# EAGLE board CAN Mirror (EAGLE 6.4)
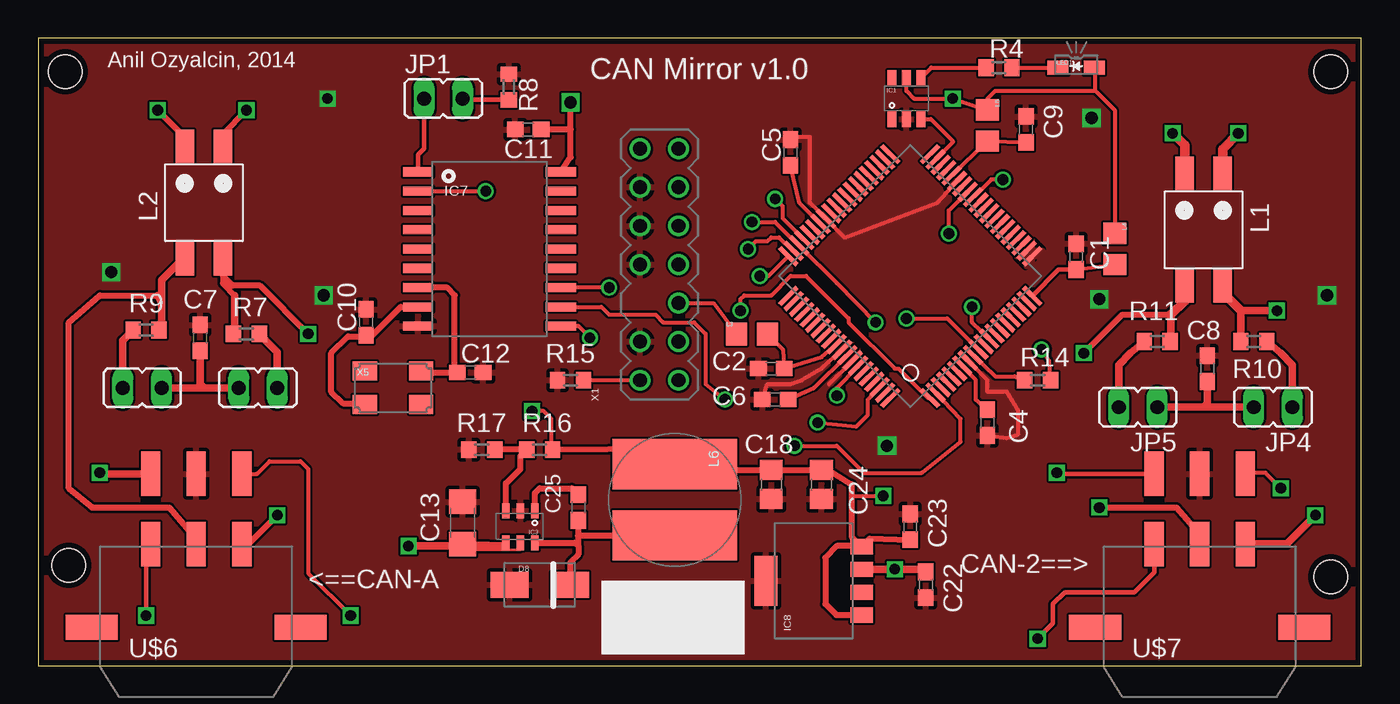
[diagram p0: board, top side]
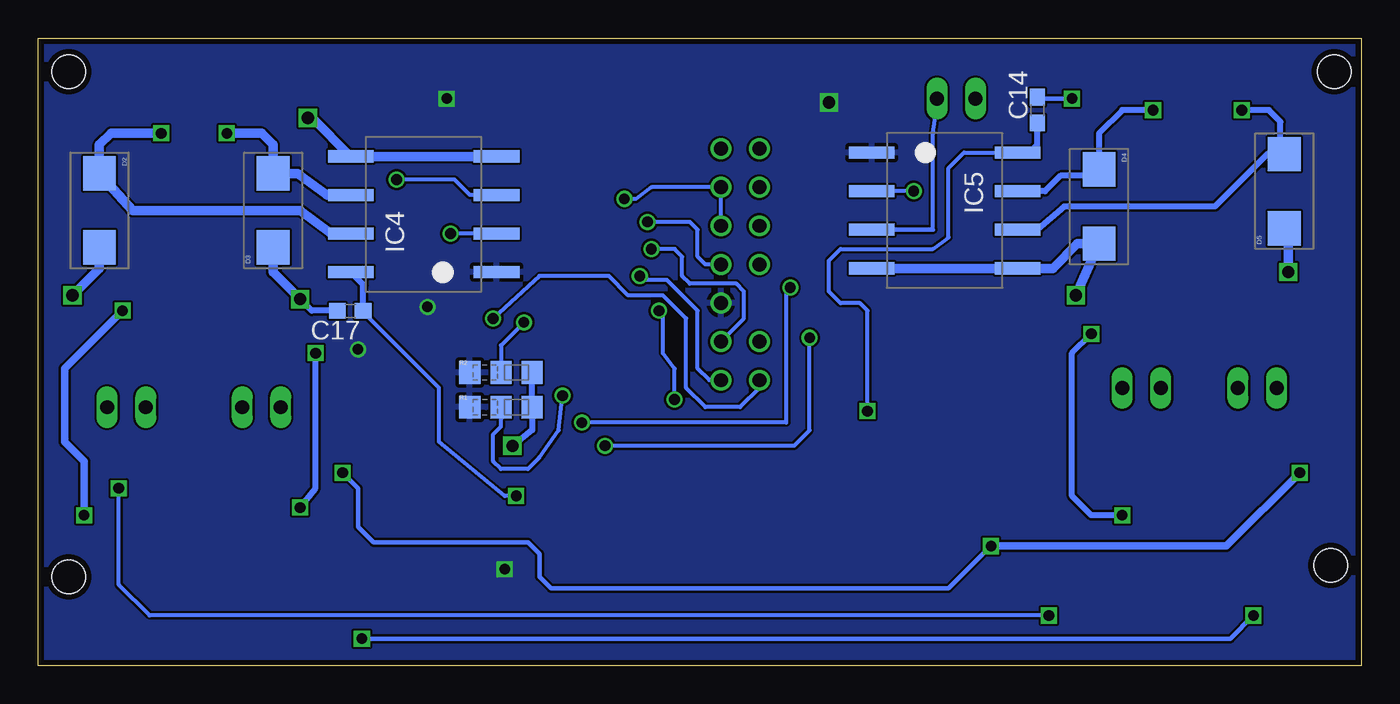
[diagram p1: board, bottom side, seen from below]

Size 87.1 x 41.33 mm. Coordinates in mm from the lower left corner, seen from the top.
Outline: 0,0 87.1,0 87.1,41.33 0,41.33 0,0
Copper layers (1*16): Top 0.0356mm / dielectric 1.5011mm / Bottom 0.0356mm
Design rules "OSH Park 2-layer": minimum track width 6mil, minimum drill 13mil, track to track 6mil, track to pad 6mil, pad to pad 6mil, via to via 6mil, smd to smd 6mil, copper to edge 15mil, drill to drill 6mil, minimum pad ring 7mil, minimum via ring 7mil, stop-mask expansion 4mil, vias tented up to drill 0mil, thermal gap 10mil
Holes 2.2 mm at 1.78,39.12 85.09,39.12 85.09,5.84 2.03,6.6

## Footprints (pad centres in the part's own frame; a part is rotated, then mirrored left to right if it is on the bottom)
C0603 = smd 1.1 x 1: 1 -0.85,0; 2 0.85,0
C1206 = smd 1.6 x 1.8: 1 -1.4,0; 2 1.4,0
C0805 = smd 1.3 x 1.5: 1 -0.95,0; 2 0.95,0
DO-214AA = smd 2.261 x 2.159: 1 -2.438,0; 2 2.438,0
SMA = smd 2.5 x 1.7: ANODE -2,0; CATHODE 2,0
DBV_(R-PDSO-G6) = smd 0.6 x 1.05: 1 -0.95,-1.35; 2 0,-1.35; 3 0.95,-1.35; 4 0.95,1.35; 5 0,1.35; 6 -0.95,1.35
SOT-6_DDC = smd 0.5 x 1: 1 -0.95,-1.05; 2 0,-1.05; 3 0.95,-1.05; 4 0.95,1.05; 5 0,1.05; 6 -0.95,1.05
DUB_(R-PDSO-G8) = smd 0.8 x 3: 1 -3.81,-4.8; 2 -1.27,-4.8; 3 1.27,-4.8; 4 3.81,-4.8; 5 3.81,4.8; 6 1.27,4.8; 7 -1.27,4.8; 8 -3.81,4.8
SOIC18 = smd 0.6 x 2: 1 -5.08,-4.7; 2 -3.81,-4.7; 3 -2.54,-4.7; 4 -1.27,-4.7; 5 0,-4.7; 6 1.27,-4.7; 7 2.54,-4.7; 8 3.81,-4.7; 9 5.08,-4.7; 10 5.08,4.7; 11 3.81,4.7; 12 2.54,4.7; 13 1.27,4.7; 14 0,4.7; 15 -1.27,4.7; 16 -2.54,4.7; 17 -3.81,4.7; 18 -5.08,4.7
SOT-223-5 = smd 1 x 1.5: 1 -2.25,-3.15; 2 -0.75,-3.15; 3 0.75,-3.15; 4 2.25,-3.15 | smd 3.3 x 1.5: 5 0,3.15
JP1 = drill 0.914 long: 1 0,-1.27; 2 0,1.27
SMD = smd 2.21 x 1.2: 1 -3.7,1.25; 2 -3.7,-1.25; 3 3.7,-1.25; 4 3.7,1.25
0603 = smd 1.4 x 1.5: A 1.025,0; B -1.025,0
VLP8040 = smd 3.3 x 8.2: 1 2.35,0; 2 -2.35,0
SMS1105 = smd 1.4 x 0.9: ANODE 1.2,0; CATHODE -1.2,0
0603-JUMPER-3WAY = smd 1.4 x 1.5: A 1.025,0; B -1.025,0; C 3.075,0
R0603 = smd 1 x 1.1: 1 -0.85,0; 2 0.85,0
PQFP-80_(S-PQFP-G80) = smd 0.3 x 1.6: 1 -4.75,-6.6; 2 -4.25,-6.6; 3 -3.75,-6.6; 4 -3.25,-6.6; 5 -2.75,-6.6; 6 -2.25,-6.6; 7 -1.75,-6.6; 8 -1.25,-6.6; 9 -0.75,-6.6; 10 -0.25,-6.6; 11 0.25,-6.6; 12 0.75,-6.6; 13 1.25,-6.6; 14 1.75,-6.6; 15 2.25,-6.6; 16 2.75,-6.6; 17 3.25,-6.6; 18 3.75,-6.6; 19 4.25,-6.6; 20 4.75,-6.6; 41 4.75,6.6; 42 4.25,6.6; 43 3.75,6.6; 44 3.25,6.6; 45 2.75,6.6; 46 2.25,6.6; 47 1.75,6.6; 48 1.25,6.6; 49 0.75,6.6; 50 0.25,6.6; 51 -0.25,6.6; 52 -0.75,6.6; 53 -1.25,6.6; 54 -1.75,6.6; 55 -2.25,6.6; 56 -2.75,6.6; 57 -3.25,6.6; 58 -3.75,6.6; 59 -4.25,6.6; 60 -4.75,6.6 | smd 1.6 x 0.3: 21 6.6,-4.75; 22 6.6,-4.25; 23 6.6,-3.75; 24 6.6,-3.25; 25 6.6,-2.75; 26 6.6,-2.25; 27 6.6,-1.75; 28 6.6,-1.25; 29 6.6,-0.75; 30 6.6,-0.25; 31 6.6,0.25; 32 6.6,0.75; 33 6.6,1.25; 34 6.6,1.75; 35 6.6,2.25; 36 6.6,2.75; 37 6.6,3.25; 38 6.6,3.75; 39 6.6,4.25; 40 6.6,4.75; 61 -6.6,4.75; 62 -6.6,4.25; 63 -6.6,3.75; 64 -6.6,3.25; 65 -6.6,2.75; 66 -6.6,2.25; 67 -6.6,1.75; 68 -6.6,1.25; 69 -6.6,0.75; 70 -6.6,0.25; 71 -6.6,-0.25; 72 -6.6,-0.75; 73 -6.6,-1.25; 74 -6.6,-1.75; 75 -6.6,-2.25; 76 -6.6,-2.75; 77 -6.6,-3.25; 78 -6.6,-3.75; 79 -6.6,-4.25; 80 -6.6,-4.75
MICROFIT-6-DUAL-RA-SMD = smd 1.27 x 2.921: 1 3,5.47; 2 0,5.47; 3 -3,5.47; 4 3,10.1; 5 0,10.1; 6 -3,10.1 | smd 3.429 x 1.651: P$9 6.883,0; P$10 -6.883,0
TI_JTAG_HEADER = drill 0.914: 1 -7.62,-1.27; 2 -7.62,1.27; 3 -5.08,-1.27; 4 -5.08,1.27; 5 -2.54,-1.27; 7 0,-1.27; 8 0,1.27; 9 2.54,-1.27; 10 2.54,1.27; 11 5.08,-1.27; 12 5.08,1.27; 13 7.62,-1.27; 14 7.62,1.27
ECX-53B = smd 1.6 x 1.25: 1 -1.85,-1.1; 2 1.85,-1.1; 3 1.85,1.1; 4 -1.85,1.1

## Placement (x,y rotation side)
C1  2.2uF  [C0603]  68.33,26.92 90 top
C2  2.2uF  [C0603]  48.26,19.56 180 top
C4  2.2uF  [C0603]  62.48,16 270 top
C5  2.2uF  [C0603]  49.53,33.78 90 top
C6  2.2uF  [C0603]  48.51,17.53 180 top
C7  4.7 nF  [C0603]  10.67,21.59 90 top
C8  4.7 nF  [C0603]  76.96,19.56 90 top
C9  2.2uF  [C0603]  65.02,35.31 90 top
C10  8pF  [C0603]  21.59,22.61 90 top
C11  0.1uF  [C0603]  32.26,35.31 180 top
C12  8pF  [C0603]  28.45,19.3 0 top
C13  1 uF  [C1206]  27.94,9.4 90 top
C14  2.2 uF  [C0603]  21.34,36.58 90 bottom
C17  2.2 uF  [C0603]  66.55,23.37 180 bottom
C18  22 uF  [C0805]  48.26,11.94 270 top
C22  10 uF  [C0603]  58.42,5.33 270 top
C23  4.7 uF  [C0603]  57.4,9.14 90 top
C24  22 uF  [C0805]  51.56,11.94 270 top
C25  0.1 uF  [C0603]  35.56,10.41 270 top
D2  [DO-214AA]  83.06,29.97 270 bottom
D3  [DO-214AA]  71.63,29.97 90 bottom
D4  [DO-214AA]  17.27,30.23 270 bottom
D5  [DO-214AA]  5.08,31.24 90 bottom
D8  [SMA]  33.02,5.33 0 top
IC1  SN74LVCG207DBV  [DBV_(R-PDSO-G6)]  57.15,37.34 0 top
IC3  LMR14206  [SOT-6_DDC]  31.75,9.14 180 top
IC4  ISO1050  [DUB_(R-PDSO-G8)]  61.72,29.72 90 bottom
IC5  ISO1050  [DUB_(R-PDSO-G8)]  27.43,29.97 270 bottom
IC7  MCP2515-I/SO  [SOIC18]  29.72,27.43 270 top
IC8  LP38693-3.3/NOPBMP  [SOT-223-5]  51.05,5.59 90 top
JP1  [JP1]  26.67,37.34 270 top
JP2  [JP1]  14.48,18.29 90 top
JP3  [JP1]  6.86,18.29 90 top
JP4  [JP1]  81.28,17.02 90 top
JP5  [JP1]  72.39,17.02 90 top
L1  DR331-513AE  [SMD]  76.71,28.7 270 top
L2  DR331-513AE  [SMD]  10.92,30.48 270 top
L3  [0603]  46.99,21.84 0 top
L4  [0603]  70.87,27.43 270 top
L5  [0603]  62.48,35.56 270 top
L6  18 uH  [VLP8040]  41.91,10.92 270 top
LED1  [SMS1105]  68.33,39.37 0 top
R1  [0603-JUMPER-3WAY]  57.66,17.02 0 bottom
R2  [0603-JUMPER-3WAY]  57.66,19.3 0 bottom
R4  300  [R0603]  63.25,39.37 0 top
R7  60  [R0603]  13.72,21.84 0 top
R8  4.7k  [R0603]  30.99,38.1 270 top
R9  60  [R0603]  7.11,22.1 180 top
R10  60  [R0603]  80.01,21.34 0 top
R11  60  [R0603]  73.66,21.34 180 top
R14  2k2  [R0603]  65.79,18.8 0 top
R15  2k2  [R0603]  35.05,18.8 0 top
R16  5.6k 1%  [R0603]  33.02,14.22 0 top
R17  1k 1%  [R0603]  29.21,14.22 0 top
U$1  TMS320F28034PNT  [PQFP-80_(S-PQFP-G80)]  57.4,25.65 45 top
U$2  CURRENT-C-LETTER-LANDSCAPE  [BLANK]  -38.1,67.31 0 top  (outside the outline)
U$3  CURRENT-C-LETTER-LANDSCAPE  [BLANK]  -66.04,-2.54 0 top  (outside the outline)
U$5  CURRENT-C-LETTER-LANDSCAPE  [BLANK]  -40.64,67.31 0 top  (outside the outline)
U$6  MICROFIT-06-DUAL-RA-SMD  [MICROFIT-6-DUAL-RA-SMD]  10.41,2.54 0 top
U$7  MICROFIT-06-DUAL-RA-SMD  [MICROFIT-6-DUAL-RA-SMD]  76.45,2.54 0 top
X1  [TI_JTAG_HEADER]  40.89,26.42 90 top
X5  20 MHz  [ECX-53B]  23.37,18.29 0 top

## Library data of the parts
C1 C2 C4-C12 C14 C17 C22 C23 C25 R4 R7-R11 R14 R15 = rcl
C13 = rcl; PARTNO: GRM32RR71H105KA01L
C18 C24 = rcl; PARTNO: GRM21BR60J226ME39L
D2-D5 = Littelfuse; PARTNO: SMBJ30CALFCT-ND
D8 = Diodes; PARTNO: B130-13-F
IC1 IC3 X1 = TI
IC4 IC5 = TI; PARTNO: ISO1050DUBR
IC7 = Microchip; PARTNO: MCP2515-I/SO
IC8 = TI; PARTNO: LP38693MP-3.3/NOPB
JP1-JP5 = jumper
L1 L2 = Bourns; PARTNO: DR331-513AECT-ND
L3-L5 R1 R2 = Passives
L6 = TDK; PARTNO: SDR0604-180YL
LED1 = Bivar
R16 = rcl; PARTNO: RR0510P-3321-D
R17 = rcl; PARTNO: CRCW04021K00JNTD
U$1 = TI; PARTNO: TMS320F28035PNT
U$2 U$3 U$5 = Frames; BOM: EXCLUDE
U$6 U$7 = Molex
X5 = Crystals

## Nets
!INT: IC7.12 U$1.78
!RX0BF: IC7.11 U$1.1
!RX1BF: IC7.10 U$1.2
+3V3: C11.1 C22.1 IC1.5 IC4.1 IC5.1 IC7.18 IC8.3 L3.B L4.B L5.B LED1.ANODE R1.B R2.B R14.2 U$1.12 X1.5
+5V: C14.1 C17.1 C18.1 C23.1 C24.1 IC4.8 IC5.8 IC8.1 IC8.4 L6.2 R16.2
+12V: C13.1 IC3.4 IC3.5 U$6.6 U$7.6
BTN: U$1.3
CAM_!CS: IC7.16
CAM_!RST: IC7.17
CAM_SCK: IC7.13
CAM_SI: IC7.14
CAM_SO: IC7.15
CAN_!CS: U$1.75
CAN_!RST: U$1.61
CAN_SCK: U$1.77
CAN_SI: U$1.80
CAN_SO: U$1.76
CANH_2: L1.4 R10.1 U$7.1
CANH_2_NF: D2.1 IC4.7 L1.1
CANH_A: L2.4 R7.1 U$6.1
CANH_A_NF: D4.1 IC5.7 L2.1
CANL_2: L1.3 R11.1 U$7.2
CANL_2_NF: D3.2 IC4.6 L1.2
CANL_A: L2.3 R9.1 U$6.2
CANL_A_NF: D5.2 IC5.6 L2.2
EMU0: X1.13
EMU1: X1.14
GND: C1.2 C2.2 C4.2 C5.2 C6.2 C7.2 C8.2 C9.2 C10.2 C11.2 C12.2 C13.2 C14.2 C17.2 C18.2 C22.2 C23.2 C24.2 D2.2 D3.1 D4.2 D5.1 D8.ANODE IC1.2 IC3.2 IC4.4 IC4.5 IC5.4 IC5.5 IC7.9 IC8.5 R1.C R2.C R8.1 R15.1 R17.1 U$1.8 U$1.21 U$1.22 U$1.35 U$1.53 U$1.71 U$1.73 U$6.5 U$7.5 X1.4 X1.8 X1.10 X1.12
GPIO34: R1.A U$1.74
JTAG_!TRST: R15.2 U$1.10 X1.2
JTAG_TCK: U$1.57 X1.9 X1.11
JTAG_TDI: U$1.59 X1.3
JTAG_TDO: R2.A U$1.58 X1.7
JTAG_TMS: U$1.60 X1.1
LED0: U$1.34
LED1: IC1.3 U$1.39
N$1: R14.1 U$1.9
N$2: C1.1 L4.A U$1.20
N$3: C2.1 L3.A U$1.70
N$4: IC1.4 R4.1
N$5: C6.1 U$1.72
N$6: C5.1 U$1.54
N$7: C4.1 U$1.7
N$9: LED1.CATHODE R4.2
N$10: C9.1 L5.A U$1.36
N$12: JP2.1 R7.2
N$13: JP3.2 R9.2
N$14: C7.1 JP2.2 JP3.1
N$15: JP4.1 R10.2
N$16: JP5.2 R11.2
N$17: C8.1 JP4.2 JP5.1
N$21: C25.2 D8.CATHODE IC3.6 L6.1
N$22: C25.1 IC3.1
N$24: C10.1 IC7.8 X5.1
N$25: C12.1 IC7.7 X5.3
RXCAN0: IC4.2 U$1.33
RXCAN1: IC5.2 IC7.2
SHIELD: U$6.4 U$7.4
SHIELD_GND: U$6.3 U$7.3
TXCAN0: IC4.3 U$1.32
TXCAN1: IC7.1 JP1.1
TXCAN_NJ: IC5.3 JP1.2 R8.2
VSENSE1: IC3.3 R16.1 R17.2

## Tracks (layer width: path | path; a pad name or v marks a point on that pad's centre or on a via)
!INT  (via drill 0.7)
  Top 0.254: U$1.78 54.61,17.53 54.61,16.51 53.85,15.75 v51.31,16 | v37.59,24.89 IC7.12
  Bottom 0.254: v51.31,16 37.85,16 37.85,24.64 v37.59,24.89
!RX0BF  (via drill 0.7)
  Top 0.254: IC7.11 37.08,23.62 37.59,23.11 40.64,23.11 41.15,22.61 43.18,22.61 43.94,21.84 43.94,18.54 v45.21,17.53 | U$1.1 58.57,17.63 56.64,19.56 56.39,19.56 53.34,22.61 53.34,22.86 50.55,25.65 49.53,25.65 48.26,24.38 46.48,24.38 46.23,24.13 v46.23,23.37
  Bottom 0.254: v45.21,17.53 45.21,19.56 45.97,20.57 45.97,23.11 v46.23,23.37
!RX1BF  (via drill 0.7)
  Top 0.254: U$1.2 60.71,16.26 60.71,14.73 58.2,12.72 | 58.2,12.72 58.17,12.7 | IC7.10 35.56,22.35 v36.32,21.59 | v49.78,14.48 52.58,14.48 54.36,12.7 58.17,12.7 58.2,12.72
  Bottom 0.254: v36.32,21.59 36.32,15.49 37.34,14.48 v49.78,14.48
+3V3  (via drill 0.7, 0.8)
  Top 0.254: v61.47,23.62 61.47,22.61 U$1.12 | X1.5 44.45,23.88 L3.B | L4.B 70.87,36.58 69.6,37.85 | 69.6,37.85 62.99,37.85 62.48,37.34 L5.B v60.2,37.34 57.66,37.34 57.15,37.85 IC1.5 | 69.6,37.85 69.6,39.3 LED1.ANODE | v66.04,20.83 66.55,20.07 R14.2
  Top 0.406: IC8.3 54.45,6.1 | 57.82,6.35 C22.1 | 35.05,35.31 35.05,33.48 IC7.18 | 35.05,35.31 v35.05,37.08 | 35.05,35.31 C11.1
  Top 0.508: 57.82,6.35 v56.39,6.35 54.22,6.35 IC8.3
  pour Bottom: -2.79,-3.56 88.65,-3.56 88.39,43.69 -3.05,43.69
+5V  (via drill 0.7)
  Top 0.254: 53.54,11.18 v55.63,11.18 | v32.51,16.76 33.27,16.76 33.78,16.26 33.78,14.31 R16.2
  Top 0.406: R16.2 41.17,14.29 L6.2 42.04,12.89 C18.1 C24.1 52.02,12.89 53.54,11.94 53.54,11.18 53.54,8.5 IC8.4 | C23.1 54.75,8.38 IC8.4 | IC8.1 52.54,3.34 51.82,4.06 51.82,7.11 52.58,7.87 54.17,7.87 IC8.4
  Bottom 0.254: C17.1 65.7,23.28 60.71,18.29 60.71,14.73 56.39,11.18 v55.63,11.18 | IC5.8 26.16,33.78 27.18,32.77 27.18,28.19 28.19,27.43 34.29,27.43 35.05,26.67 35.05,24.64 34.29,23.88 33.02,23.88 32.51,23.37 v32.51,16.76
  Bottom 0.406: C17.1 65.7,25.08 IC4.8 | C14.1 21.34,34.29 21.84,33.78 IC5.8
+12V  (via drill 0.7)
  Top 0.152: IC3.5 31.75,7.62 27.94,7.62 C13.1
  Top 0.305: U$7.6 67.12,12.64 v67.06,12.7
  Top 0.406: 30.61,7.9 IC3.4
  Top 0.508: 30.61,7.9 C13.1 27.82,7.87 v24.38,7.87 | U$6.6 4.06,12.64 v4.06,12.7
  Bottom 0.305: v67.06,12.7 66.04,11.68 66.04,9.14 65.02,8.13 54.86,8.13 54.1,7.37 54.1,5.84 53.34,5.08 27.18,5.08 v24.38,7.87
  Bottom 0.508: v4.06,12.7 8.89,7.87 v24.38,7.87
CANH_2  (via drill 0.7)
  Top 0.508: R10.1 79.16,23.37 v81.53,23.37 | U$7.1 82.18,8.01 v84.07,9.91
  Top 0.61: L1.4 77.96,24.57 79.16,23.37
  Bottom 0.508: v84.07,9.91 84.07,13.46 85.34,14.73 85.34,19.56 v81.53,23.37
CANH_2_NF  (via drill 0.7)
  Top 0.61: L1.1 77.96,34.02 v78.99,35.05
  Bottom 0.61: IC4.7 67.82,28.45 69.85,29.97 80.87,29.97 D2.1 83.06,34.29 82.3,35.05 v78.99,35.05
CANH_A  (via drill 0.7)
  Top 0.406: U$6.1 13.85,8.01 v15.75,9.91 | v17.78,21.84 14.61,25.02 12.81,25.02 12.17,25.65 | 12.17,25.65 12.17,25.17 12.95,24.38 | 12.17,25.65 L2.4
  Top 0.508: 12.95,24.38 12.95,21.93 R7.1
  Bottom 0.406: v15.75,9.91 17.78,9.91 19.05,11.18 19.05,20.57 v17.78,21.84
CANH_A_NF  (via drill 0.7)
  Top 0.406: L2.1 12.17,35.03 v13.72,36.58
  Bottom 0.406: IC5.7 20.83,31.24 19.81,32.26 17.68,32.26 D4.1 | v13.72,36.58 15.75,36.58 17.27,35.05 D4.1 | D4.1 17.27,32
CANL_2  (via drill 0.7)
  Top 0.406: U$7.2 76.45,8.64 74.93,10.41 v69.85,10.41 | v68.83,20.57 71.37,23.11 74.57,23.11
  Top 0.508: 74.57,23.11 74.57,21.39 R11.1
  Top 0.61: L1.3 75.46,24.01 74.57,23.11
  Bottom 0.406: v69.85,10.41 68.83,11.68 v68.83,20.57
CANL_2_NF  (via drill 0.7)
  Top 0.61: L1.2 75.46,34.27 v74.68,35.05
  Bottom 0.61: v74.68,35.05 72.39,35.05 71.63,34.29 D3.2 70,32.41 68.07,30.99 IC4.6
CANL_A
  Top 0.406: 10.16,8.64 8.64,10.41 3.56,10.41 2.03,11.68 2.03,22.61 4.06,24.38 7.87,24.38 | 9.51,26.78 L2.3
  Top 0.508: 8.13,23.88 8.13,22.19 R9.1 | 8.13,23.88 8.13,25.4 9.51,26.78 | 10.16,8.64 U$6.2 | 7.87,24.38 8.13,23.88
CANL_A_NF  (via drill 0.7)
  Top 0.406: L2.2 9.67,34.78 v7.87,36.58
  Bottom 0.406: IC5.6 21.34,28.7 19.56,30.23 9.65,30.23 6.2,33.68 D5.2 5.33,33.93 5.33,35.81 6.1,36.58 v7.87,36.58
GND  (via drill 0.7, 0.8)
  Top 0.254: C5.2 49.95,34.8 50.8,34.8 50.8,30.48 U$1.53 53.09,28.19 59.18,30.48 U$1.35 | U$1.8 62.48,18.8 62.48,18.03 63.75,18.03 64.52,16.76 64.52,15.24 63.75,14.99 C4.2 | U$1.71 51.56,19.56 50.29,18.8 49.53,18.54 48.01,18.54 C6.2 | U$1.73 52.58,19.05 52.07,18.54
  Bottom 0.305: v19.05,37.34 21.25,37.34 C14.2
  Bottom 0.406: 4.83,28.55 D5.1 | R2.C R1.C 54.58,15.52 v55.88,14.48 | C17.2 69.09,23.37 v69.85,24.13
  Bottom 0.61: v4.83,25.91 4.83,28.55 | v18.8,24.38 D4.2 18.69,27.79 20.32,26.16 IC5.5 IC5.4 | D3.1 71.63,25.91 v69.85,24.13 | D2.2 83.06,26.16 v84.84,24.38 | IC4.4 IC4.5 69.06,36.07 v69.34,36.07
  pour Top: -2.29,-3.05 90.17,-2.79 90.17,42.67 -2.54,42.93
GPIO34  (via drill 0.7)
  Top 0.254: v52.58,17.78 52.58,18.29 53.97,19.68 U$1.74
  Bottom 0.254: 56.64,17.01 56.64,15.75 57.15,15.24 57.15,13.46 56.64,12.95 54.86,12.95 54.1,13.72 52.83,15.49 v52.58,17.78
  Bottom 0.305: 56.64,16.26 56.64,17.01 R1.A
JTAG_!TRST  (via drill 0.7)
  Top 0.254: R15.2 X1.2 | v57.15,22.86 59.84,22.86 U$1.10
  Bottom 0.254: X1.2 39.62,18.29 40.89,17.02 43.18,17.02 44.45,18.29 44.45,22.86 45.97,24.38 48.26,24.38 49.53,25.65 54.1,25.65 v57.15,22.86
JTAG_TCK  (via drill 0.7)
  Top 0.254: U$1.57 49,29.46 49,30.25 v48.51,30.73
  Bottom 0.254: X1.9 X1.11 46.74,31.5 47.75,30.73 v48.51,30.73
JTAG_TDI  (via drill 0.7)
  Top 0.254: U$1.59 49.65,27.32 48.77,28.19 48.26,28.19 48.01,27.94 47.24,27.94 v46.74,27.43
  Bottom 0.254: v46.74,27.43 45.21,27.43 44.7,26.92 44.7,25.65 44.2,25.15 41.15,25.15 40.64,24.64 40.64,22.86 X1.3
JTAG_TDO  (via drill 0.7)
  Top 0.254: v55.12,22.61 52.58,25.18 U$1.58 50.05,27.67 48.51,29.21 v46.99,29.21
  Bottom 0.254: R2.A 56.63,21.09 v55.12,22.61 | v46.99,29.21 44.2,29.21 43.69,28.7 43.69,26.92 43.18,26.42 X1.7
JTAG_TMS  (via drill 0.7)
  Top 0.254: v47.5,25.65 48.07,25.65 U$1.60
  Bottom 0.254: X1.1 42.93,18.8 43.69,19.56 43.69,23.37 45.72,25.4 47.24,25.4 v47.5,25.65
LED0
  Top 0.254: 60.45,31.24 60.52,31.24 U$1.34
LED1
  Top 0.254: IC1.3 58.75,35.99 60.2,34.54 60.2,34.46 U$1.39
N$1
  Top 0.254: U$1.9 62.99,19.05 64.26,19.05 R14.1
N$2
  Top 0.254: C1.1 L4.A
  Top 0.305: C1.1 67.16,26.07 U$1.20
N$3
  Top 0.254: U$1.70 51.56,20.32 C2.1 49.02,20.83 L3.A
N$4
  Top 0.254: R4.1 58.78,39.37 IC1.4
N$5
  Top 0.254: U$1.72 51.05,18.29 C6.1
N$6
  Top 0.254: C5.1 50.13,30.46 U$1.54
N$7
  Top 0.254: U$1.7 60.83,19.68 61.72,18.8 61.72,17.53 62.23,17.02 C4.1
N$9
  Top 0.254: R4.2 LED1.CATHODE
N$10
  Top 0.254: C9.1 L5.A U$1.36
N$12
  Top 0.508: JP2.1 15.75,20.66 R7.2
N$13
  Top 0.508: JP3.2 5.59,21.42 R9.2
N$14
  Top 0.508: JP3.1 10.92,18.29 | 10.92,18.29 JP2.2 | C7.1 10.67,18.54 10.92,18.29
N$15
  Top 0.508: JP4.1 82.55,19.81 81.79,20.57 R10.2
N$16
  Top 0.508: R11.2 71.88,20.57 71.12,19.81 JP5.2
N$17
  Top 0.508: JP5.1 76.71,17.02 | 76.71,17.02 JP4.2 | C8.1 76.96,17.27 76.71,17.02
N$21
  Top 0.406: 35.56,7.87 35.56,7.33 35.02,6.79 D8.CATHODE | 35.56,7.87 C25.2 35.54,8.57 L6.1 42.64,9.33 | IC3.6 35.34,8.09 35.56,7.87
N$22
  Top 0.406: IC3.1 32.7,11.36 33.02,11.68 35.14,11.68 C25.1
N$24
  Top 0.406: 21.52,21.68 20.41,21.68 19.3,20.57 19.3,18.03 20.07,17.27 21.43,17.27 X5.1 | IC7.8 23.88,23.62 22.01,21.76 C10.1
  Top 0.61: 21.52,21.68 C10.1
N$25
  Top 0.406: X5.3 25.3,19.3 C12.1 27.43,19.47 27.43,24.38 26.92,24.89 IC7.7
RXCAN0  (via drill 0.7)
  Top 0.254: v59.94,28.45 59.94,29.96 U$1.33
  Bottom 0.254: IC4.2 v59.94,28.45
RXCAN1  (via drill 0.7)
  Top 0.254: IC7.2 v29.46,31.24
  Bottom 0.254: v29.46,31.24 IC5.2
SHIELD  (via drill 0.7)
  Top 0.254: U$6.4 14.42,12.64 15.24,13.46 17.27,13.46 17.78,12.95 17.78,6.1 v20.57,3.3 | v81.79,11.68 80.77,12.7 79.51,12.7 U$7.4
  Bottom 0.254: v20.57,3.3 79.76,3.3 81.79,5.33 v81.79,11.68
SHIELD_GND  (via drill 0.7)
  Top 0.305: U$7.3 73.45,6.14 72.14,4.83 67.56,4.83 66.8,4.06 66.8,2.79 v65.79,1.78 | v7.11,3.3 7.11,7.96 U$6.3
  Bottom 0.305: v65.79,1.78 8.64,1.78 v7.11,3.3
TXCAN0  (via drill 0.7)
  Top 0.254: U$1.32 61.59,30.85 62.74,32 v63.5,32
  Bottom 0.254: v63.5,32 59.69,32 58.67,30.99 IC4.3
TXCAN1
  Top 0.305: IC7.1 25.02,33.65 25.4,34.04 JP1.1
TXCAN_NJ
  Top 0.305: R8.2 28.03,37.25 JP1.2
  Bottom 0.254: JP1.2 27.94,36.83 28.19,35.05 28.19,28.7
  Bottom 0.305: 28.19,28.7 IC5.3
VSENSE1
  Top 0.406: IC3.3 30.8,12 31.75,12.95 31.75,13.8 R16.1 R17.2

## Text on the board
tPlace: CAN-2==> | <==CAN-A
tNames: Anil Ozyalcin, 2014 | CAN Mirror v1.0